# Altium PCB PCB1.PcbDoc
Units mm, origin at the board's own origin, x right, y up, seen from the top; angles counter-clockwise.
Board outline 152.4 x 101.6 mm, 2 copper layers (Top Layer, Bottom Layer); 17 components, 5 nets, 59 pads, 0 vias.
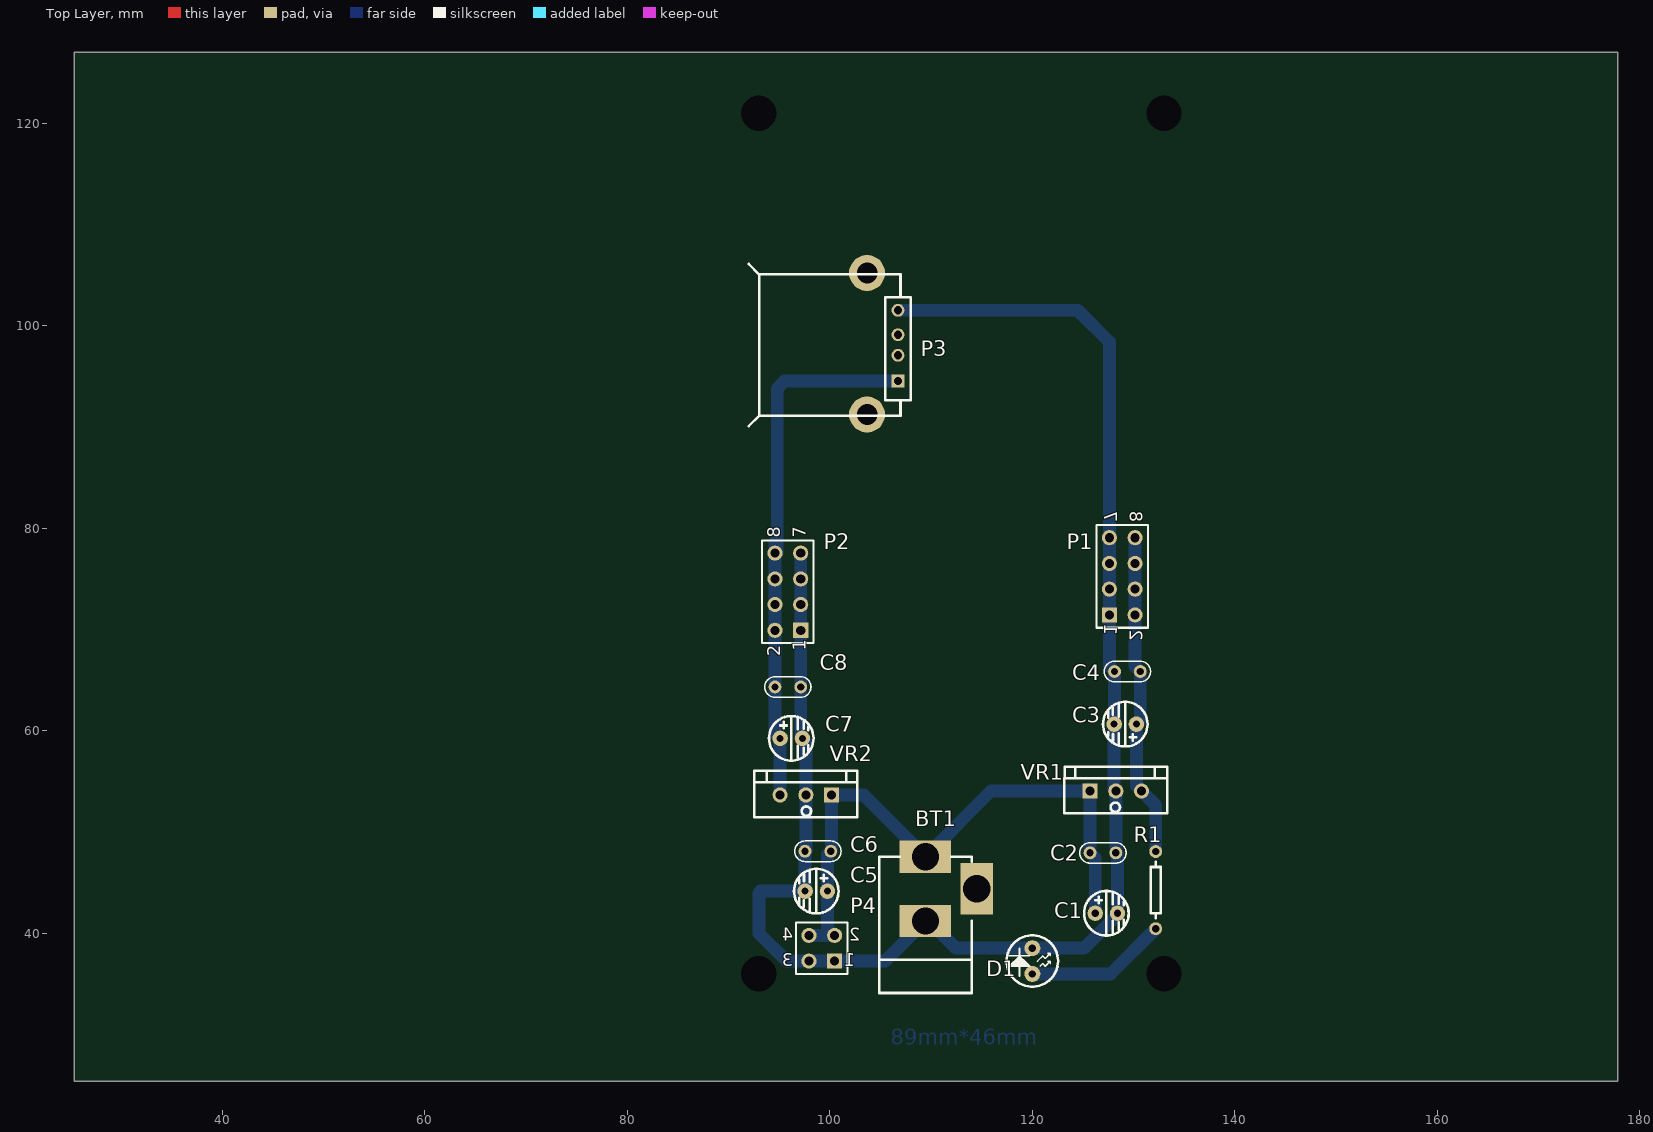
[diagram p0: Top Layer view]
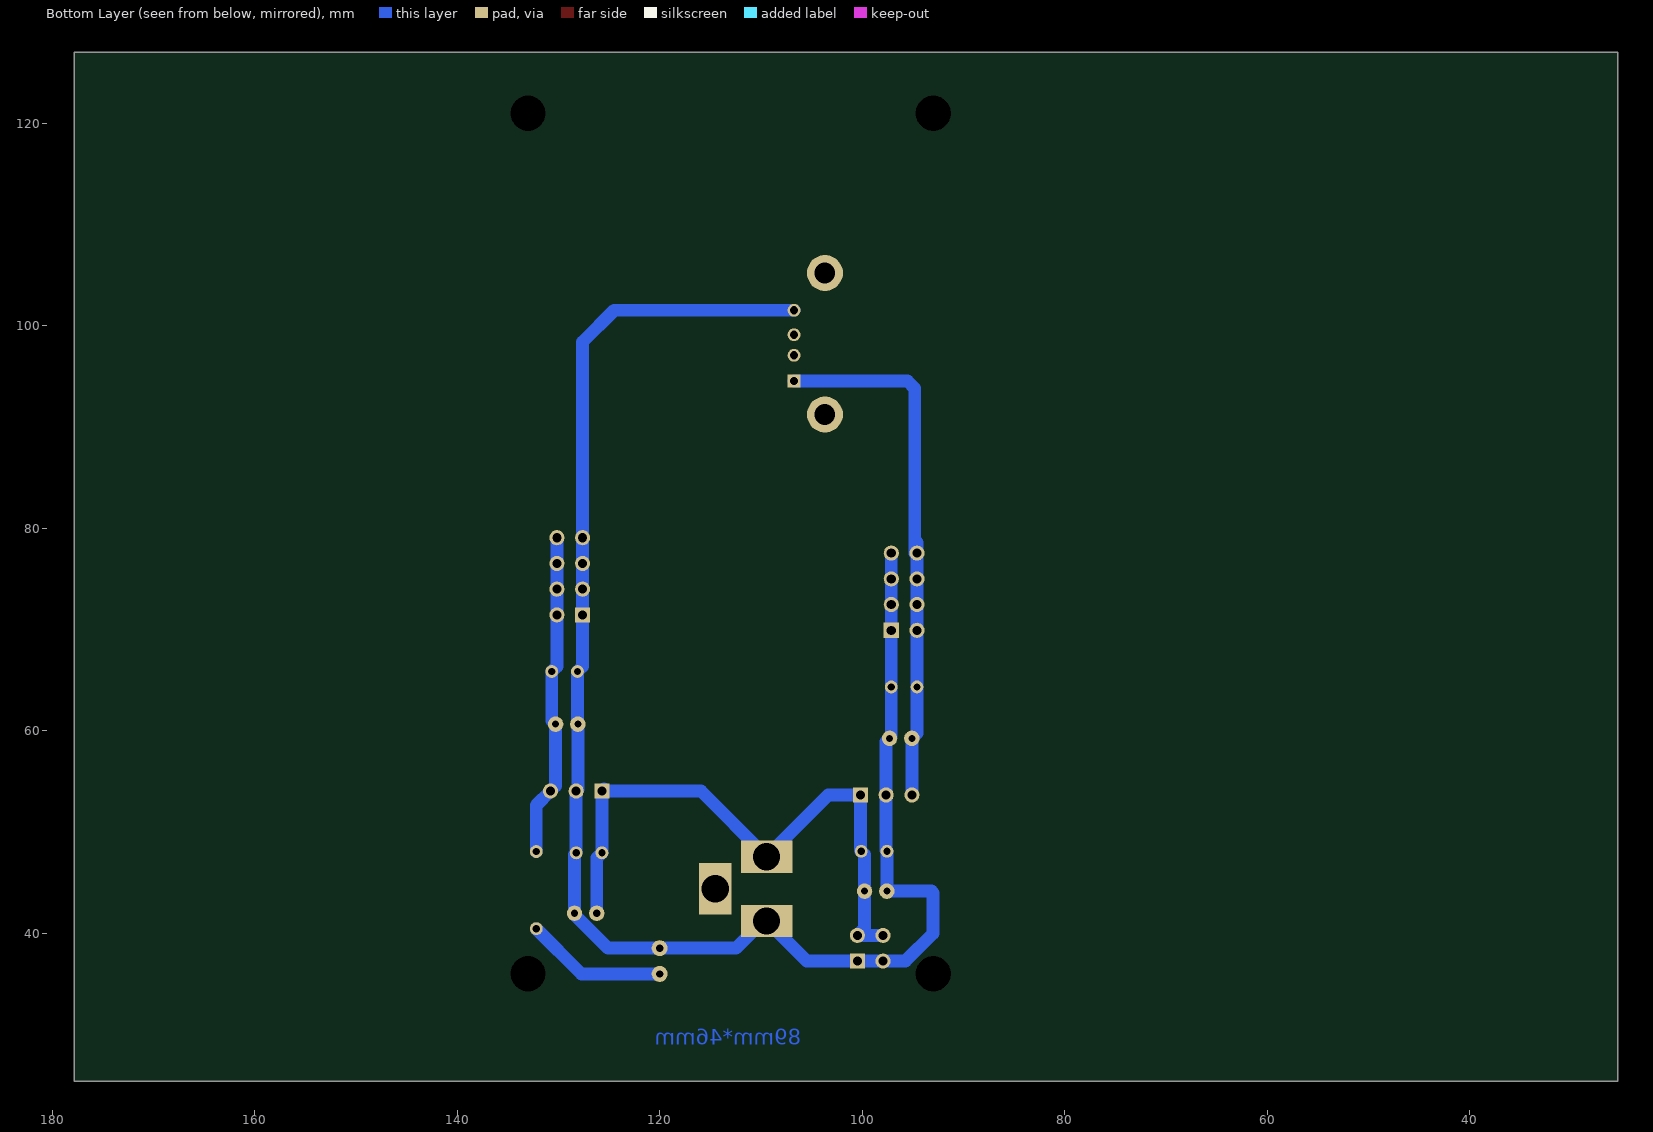
[diagram p1: Bottom Layer view, seen from below]

## Layer stack, top to bottom
Top Layer: signal copper 0.0356
Dielectric: dielectric 0.32, FR-4, Dk 4.8
Bottom Layer: signal copper 0.0356

## Board outline
25.4,25.4 177.8,25.4 177.8,127 25.4,127

## Design rules (kind name [scope] priority, off if disabled: settings)
Clearance [All] p1: gap=0.254
PolygonConnect [All] p1: connectstyle=Relief reliefconductorwidth=0.254 reliefentries=4 polygonreliefangle="90 Angle"
RoutingVias [All] p1: holewidth=0.711 width=1.27 viastyle="Through Hole" minholewidth=0.711 minwidth=1.27 maxholewidth=0.711 maxwidth=1.27
SilkscreenOverComponentPads [All] p1: minsilkscreentomaskgap=0.254
SolderMaskExpansion [All] p1: expansion=0.102
TestPointUsage [All] p1: valid=0 allowmultiple=FALSE
Testpoint [All] p1: side=3 testpointundercomponent=TRUE minsize=1.016 maxsize=2.54 preferedsize=1.524 minholesize=0 maxholesize=1.016 preferedholesize=0.813 testpointgrid=0.025 style=297 order=0123456789
Width [All] p1: maxlimit=1.27 minlimit=0.254 preferedwidth=0.254 bottomlayer_minwidth=1.27 bottomlayer_prefwidth=1.27 minimp=50.000000 maximp=50.000000 favimp=50.000000
23 further rules are at their usual default settings.

## Components (designator, comment, footprint, x,y, rotation, side; value= is the part's Value field where it differs from the comment)
BT1 "Battery" DC5V-1 109.445,47.574 r90 top
C1 "Cap Pol2" ELEC-10UF 126.211,41.985 r0 top
C2 "Cap" CAP-DIP 128.243,47.954 r180 top
C3 "Cap Pol2" ELEC-10UF 130.275,60.654 r180 top
C4 "Cap" CAP-DIP 128.116,65.861 r0 top
C5 "Cap Pol2" ELEC-10UF 99.767,44.171 r180 top
C6 "Cap" CAP-DIP 97.558,48.108 r0 top
C7 "Cap Pol2" ELEC-10UF 95.096,59.257 r0 top
C8 "Cap" CAP-DIP 97.128,64.337 r180 top
D1 "LED0" LED-DIP 120,36 r90 top
P1 "5V_motor" HDR2X4#1 127.608,71.449 r90 top
P2 "5V_senser" HDR2X4#2 97.128,69.925 r90 top
P3 "5V_usb" USB 106.731,94.539 r270 top
P4 "Header 2X2" HDR2X2 100.479,37.262 r180 top (schematic designator P?)
R1 "Res2" RES-300MIL 132.18,48.081 r270 top
VR1 "Lm2940-5.0v" 7805-DIP1 125.703,54.05 r0 top
VR2 "Lm2940-5.0v" 7805-DIP1 100.176,53.669 r180 top

## Footprints (in the part's own frame and the unit in brackets; to place one, negate y for a bottom-side part, rotate by r counter-clockwise, add the part's x,y. Pads: shape width x height; smd on the part's side, far side on the other; paste and mask are expansions set on the pad)
7805-DIP1 [mm]
  rect 1.5x1.5 hole 0.9: 1(0,0)
  round 1.5 hole 0.9: 2(2.54,0) 3(5.08,0)
  silkscreen extent -2.54,-2.2 7.62,2.4
CAP-DIP [mil]
  round 50 hole 28: 1(0,0) 2(100,0)
  silkscreen extent -40,-40 140,40
DC5V-1 [mm]
  rect 3.2x5.08 hole 2.7: 1(0,0) 2(-6.35,0)
  rect 5.08x3.2 hole 2.7: 3(-3.175,-5.08)
  silkscreen extent -13.46,-4.57 0,4.57
ELEC-10UF [mil]
  round 60 hole 27.56: 1(0,0) 2(86.61,0)
  silkscreen extent -43,-86 130,86
HDR2X2 [mm] "Connector; Header; 2x2 Position"
  rect 1.5x1.5 hole 0.9: 1(0,0)
  round 1.5 hole 0.9: 2(0,-2.54) 3(2.54,0) 4(2.54,-2.54)
  silkscreen extent -1.27,-3.81 3.81,1.27
HDR2X4#1 [mm] "Connector; Header; 4x2 Position"
  rect 1.5x1.5 hole 0.9: 1(0,0)
  round 1.5 hole 0.9: 2(0,-2.54) 3(2.54,0) 4(2.54,-2.54) 5(5.08,0) 6(5.08,-2.54) 7(7.62,0) 8(7.62,-2.54)
  silkscreen extent -1.27,-3.81 8.89,1.27
HDR2X4#2 [mm] "Connector; Header; 4x2 Position"
  rect 1.5x1.5 hole 0.9: 1(0,0)
  round 1.5 hole 0.9: 2(0,2.54) 3(2.54,0) 4(2.54,2.54) 5(5.08,0) 6(5.08,2.54) 7(7.62,0) 8(7.62,2.54)
  silkscreen extent -1.27,-1.27 8.89,3.81
LED-DIP [mil]
  round 62 hole 28: 1(0,0) 2(100,0)
  silkscreen extent -50,-100 150,100
RES-300MIL [mil]
  round 50 hole 28: 1(0,0) 2(300,0)
  silkscreen extent 40,-20 260,20
USB [mil]
  rect 50x50 hole 32: 1(0,0)
  round 50 hole 32: 2(-100,0) 3(-180,0) 4(-275,0)
  round 140 hole 80: 5(-420,-120) 6(130,-120)
  silkscreen extent -455,-580 175,50

## Part data
BT1: "Multicell Battery"
C1 C3 C5 C7: "Polarized Capacitor (Axial)"
C2 C4 C6 C8: "Capacitor"
D1: "Typical INFRARED GaAs LED"
P1 P2: library part "Header 4X2", "Header, 4-Pin, Dual row"
P3: library part "Header 4", "Header, 4-Pin"
P4: "Header, 2-Pin, Dual row"
R1: "Resistor"
VR1 VR2: library part "Volt Reg", "Voltage Regulator"

## Free pads (board coordinates)
  round 1.524 hole 3.5: 7(93,121) 8(133,121) 9(133,36) 10(93,36)

## Nets (pads, with @x,y where several pads share a name; then routed paths per layer and width w, separated by ;. In a path a pad name is that pad's centre, name@x,y a point inside that pad or via, vN(x,y) a via of type N, cw(c..) or ccw(c..) an arc to the next point about the centre after c; other vN are vias at no path point)
GND: BT1.2 C1.2 C2.1 C3.2 C4.1 C5.2 C6.1 C7.2 C8.1 D1.2 P1.1 P1.3 P1.5 P1.7 P2.1 P2.3 P2.5 P2.7 P3.4 P4.1 P4.3 VR1.2 VR2.2 | length 162.4
  Bottom Layer w1.27: P2.1@97.128,69.872 P2.1 ; P2.7 P2.5 P2.3 P2.1 ; C6.1@97.567,48.118 C5.2 93.171,44.171 93,44 93,40 95.738,37.262 P4.3 P4.1 105.482,37.262 BT1.2 ; C6.1@97.618,48.168 97.636,48.186 VR2.2 97.636,58.917 C7.2 97.128,59.425 C8.1 P2.1 ; P3.4 124.476,101.524 127.608,98.392 P1.7 P1.5 P1.3 P1.1 127.608,66.369 C4.1 128.116,60.695 C3.2 128.075,54.218 VR1.2 C2.1 128.411,47.786 C1.2 128.411,41.85 125.101,38.54 D1.2 ; D1.2@119.941,38.481 D1.2 ; BT1.2 BT1.2@109.776,41.224 ; BT1.2 BT1.2@109.776,41.224 ; BT1.2@109.776,41.224 112.46,38.54 D1.2
NetBT1_1: BT1.1 C1.1 C2.2 C5.1 C6.2 P4.2 P4.4 VR1.1 VR2.1 | length 59.6
  Bottom Layer w1.27: P4.4 P4.2 99.767,40.513 C6.2@99.767,47.778 ; C6.2@100.176,48.186 VR2.1 103.35,53.669 BT1.1 115.92,54.05 VR1.1 ; VR1.1@125.499,54.254 VR1.1 ; C1.1 126.211,47.446 C2.2 VR1.1
NetC7_1: C7.1 C8.2 P2.2 P2.4 P2.6 P2.8 P3.1 VR2.3 | length 53.8
  Bottom Layer w1.27: 94.588,78.588 P2.8 ; VR2.3 C7.1 94.588,59.765 C8.2 P2.2 P2.4 P2.6 P2.8 ; P3.1 95.539,94.539 94.81,93.81 94.81,77.545 P2.8
NetD1_1: D1.1 R1.2 | length 14
  Bottom Layer w1.27: D1.1 127.719,36 R1.2
VCC: C3.1 C4.2 P1.2 P1.4 P1.6 P1.8 R1.1 VR1.3 | length 32.1
  Bottom Layer w1.27: P1.8 P1.6 P1.4 P1.2 130.148,66.369 C4.2 130.656,61.035 C3.1 130.275,54.558 VR1.3 132.18,52.653 R1.1
pads on no net: BT1.3 P3.2 P3.3 P3.5 P3.6

## Other copper
Bottom Layer:
  text "89mm*46mm" at 106,29 h1.52

## Text inside footprints (layer, text, board x,y; h text height)
P1: Top Overlay "8" at 129.64,80.593 h1.27 r270; Top Overlay "7" at 127.1,80.593 h1.27 r270; Top Overlay "1" at 127.1,69.417 h1.27 r270; Top Overlay "2" at 129.64,68.909 h1.27 r270
P2: Top Overlay "8" at 95.096,79.069 h1.27 r90; Top Overlay "7" at 97.636,79.069 h1.27 r90; Top Overlay "1" at 97.636,67.893 h1.27 r90; Top Overlay "2" at 95.096,67.385 h1.27 r90
P4: Top Overlay "3" at 96.415,36.754 h1.27; Top Overlay "4" at 96.415,39.294 h1.27; Top Overlay "2" at 103.019,39.294 h1.27; Top Overlay "1" at 102.511,36.754 h1.27